# Altium PCB ECEN5730_BRD2.PcbDoc
Units mil, origin at the board's own origin, x right, y up, seen from the top; angles counter-clockwise.
Board outline 3500 x 2170 mil, 2 copper layers (Top Layer, Bottom Layer), stack 61.756 mil thick; 46 components, 30 nets, 147 pads, 19 vias.
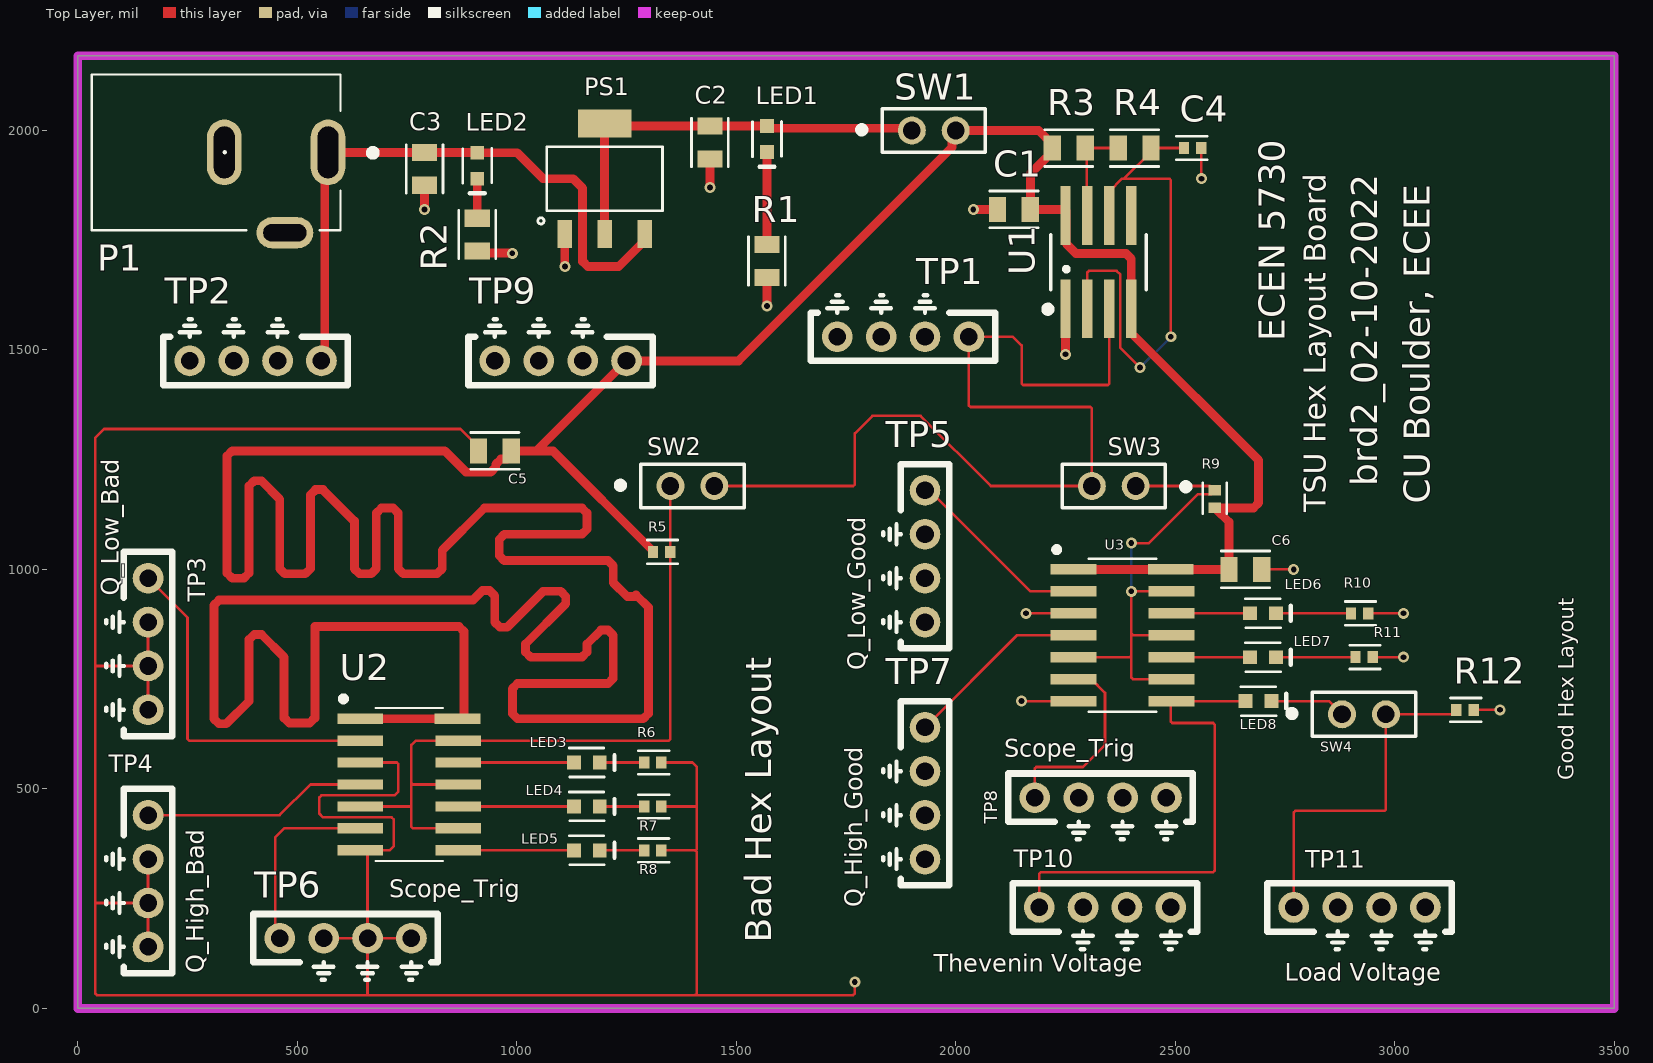
[diagram p0: Top Layer view]
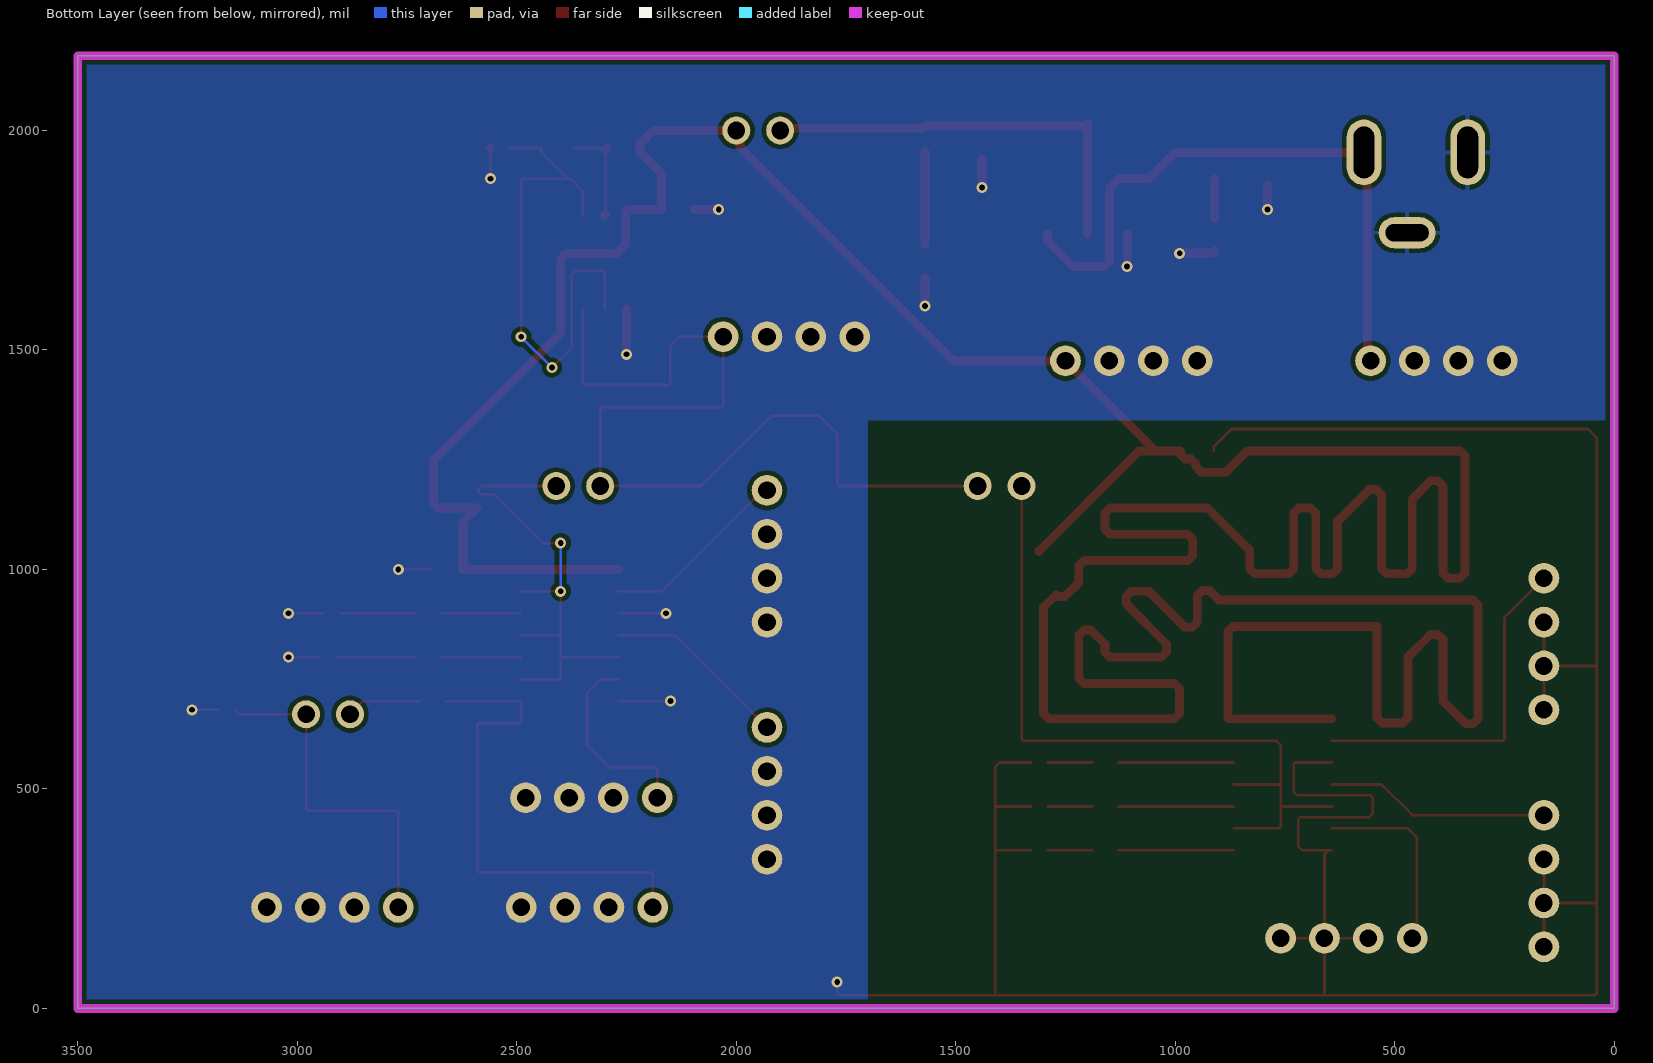
[diagram p1: Bottom Layer view, seen from below]
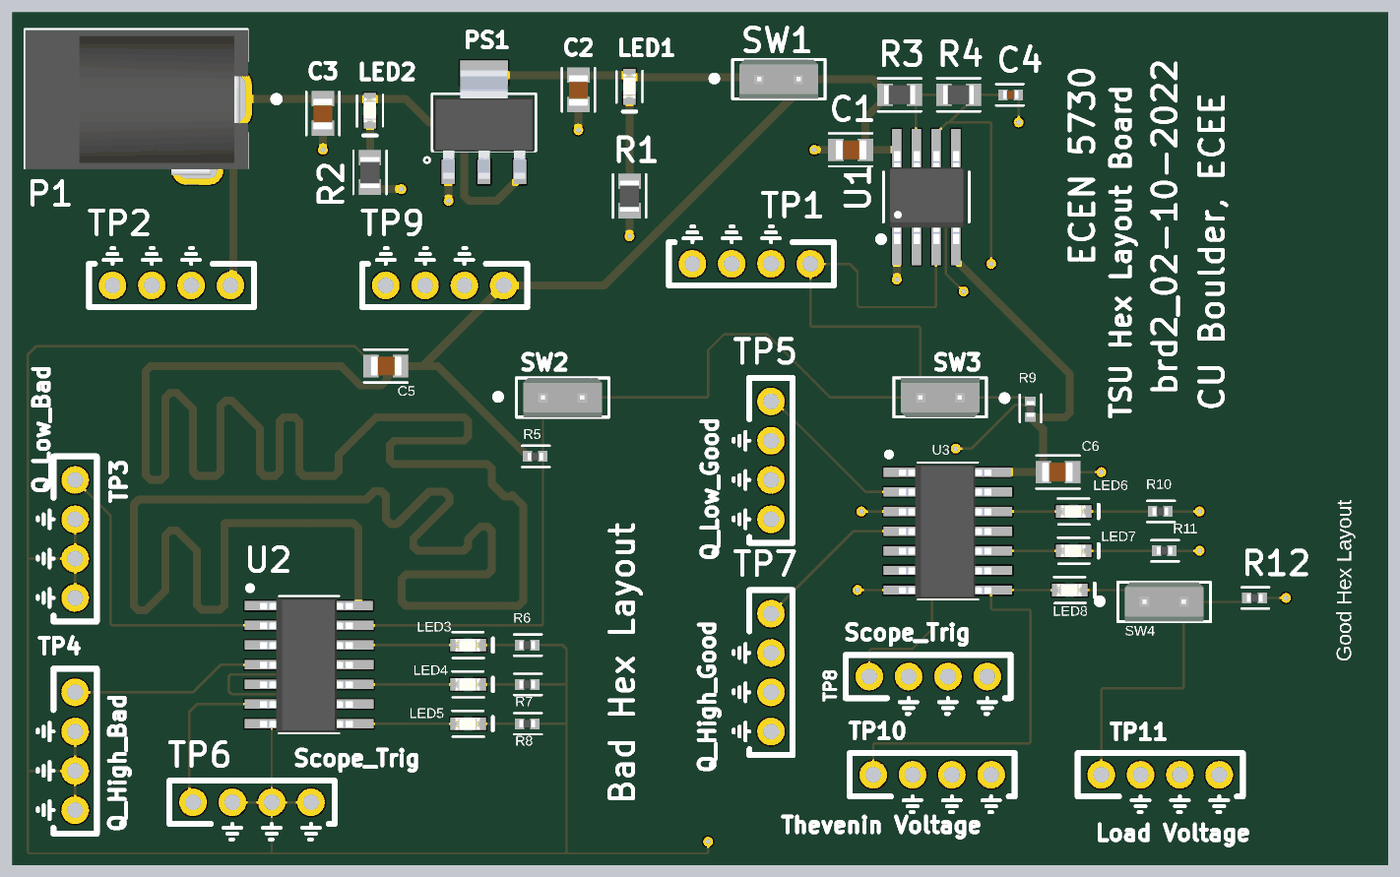
[diagram p2: 3D render of the assembled board from above, using the file's embedded part models]

## Layer stack, top to bottom
Top Solder: solder mask 1, SM-001, Dk 4
Top Layer: signal copper 1.378
Dielectric 1: core 59, Core-043, Dk 4.3
Bottom Layer: signal copper 1.378
Bottom Solder: solder mask 1, SM-001, Dk 4

## Board outline
0,0 3500,0 3500,2170 0,2170

## Design rules (kind name [scope] priority, off if disabled: settings)
Clearance [All] p1: gap=10 ignorepadtopadclearanceinfootprint=FALSE except(0: Arc-Hole Track-Hole SMDPad-Hole THPad-Hole Via-Hole Fill-Hole Poly-Hole Region-Hole Text-Hole)
PlaneClearance [All] p1: clearance=10
PlaneConnect [All] p1: planeconnectstyle=Direct reliefexpansion=20 reliefentries=4 reliefconductorwidth=10 reliefairgap=10
PolygonConnect [All] p1: connectstyle=Direct reliefconductorwidth=10 reliefentries=4 polygonreliefangle="90 Angle" airgapwidth=10
RoutingVias [All] p1: holewidth=13 width=25 viastyle="Through Hole" minholewidth=13 minwidth=25 maxholewidth=60 maxwidth=80
SolderMaskExpansion [All] p1: expansion=4 istentingtop=FALSE
UnRoutedNet [All] p1: checkbadconnections=TRUE
Width [All] p1: maxlimit=100 minlimit=5 preferedwidth=6 minimp=50.000000 maximp=50.000000 favimp=50.000000
27 further rules are at their usual default settings.

## Components (designator, comment, footprint, x,y, rotation, side; value= is the part's Value field where it differs from the comment)
C1 "22uF" 0805_Passive_Capaciitor 2132.6,1820 r180 top
C2 "22uF" 0805_Passive_Capaciitor 1440,1972.6 r90 top
C3 "22uF" 0805_Passive_Capaciitor 790,1912.6 r90 top
C4 "1uF" 0402_Passive_Capacitor 2539.69,1960 r180 top
C5 "22uF" 0805_Passive_Capaciitor 950,1270 r180 top
C6 "22uF" 0805_Passive_Capaciitor 2660,1000 r0 top
LED1 "KT-0603R" LED_0603 1570,1980.47 r270 top value=Green
LED2 "KT-0603R" LED_0603 910,1919.53 r270 top value=Red
LED3 "KT-0603R" LED_0603 1159.53,560 r0 top value=Red
LED4 "KT-0603R" LED_0603 1159.53,460 r0 top value=Red
LED5 "KT-0603R" LED_0603 1159.53,360 r0 top value=Red
LED6 "KT-0603R" LED_0603 2700,900 r0 top value=Red
LED7 "KT-0603R" LED_0603 2700,800 r0 top value=Red
LED8 "KT-0603R" LED_0603 2690,700 r0 top value=Red
P1 "Power Jack" Power_Jack 570,1950 r180 top value="CONN PWR JACK 2X5.5MM SOLDER"
PS1 "AMS1117-3.3" LDO 1200,1890 r0 top value="IC REG LINEAR 3.3V 800MA SOT223"
R1 "1k" 0805_Passive_Resistor 1570,1702.6 r270 top value="1K Ohm"
R2 "1k" 0805_Passive_Resistor 910,1762.6 r270 top value="1K Ohm"
R3 "1k" 0805_Passive_Resistor 2257.4,1960 r180 top value="1K Ohm"
R4 "1k" 0805_Passive_Resistor 2407.4,1960 r180 top value="1K Ohm"
R5 "10k" 0402_Passive_Resistor 1330,1040 r0 top value=10KOhm
R6 "50 Ohms" 0402_Passive_Resistor 1309.68,560 r0 top value=49.9Ohm
R7 "50 Ohms" 0402_Passive_Resistor 1309.68,460 r0 top value=49.9Ohm
R8 "50 Ohms" 0402_Passive_Resistor 1309.68,360 r0 top value=49.9Ohm
R9 "10k" 0402_Passive_Resistor 2590,1160.31 r90 top value=10KOhm
R10 "50 Ohms" 0402_Passive_Resistor 2920,900 r0 top value=49.9Ohm
R11 "50 Ohms" 0402_Passive_Resistor 2930.31,800 r0 top value=49.9Ohm
R12 "50 Ohms" 0402_Passive_Resistor 3160,680 r0 top value=49.9Ohm
SW1 "SW_555_On/Off" 2Pin-Header-Conn 1900,2000 r0 top
SW2 "SW_2Pin_100mil_Switch" 2Pin-Header-Conn 1350,1190 r0 top
SW3 "SW_2Pin_100mil_Switch" 2Pin-Header-Conn 2410,1190 r180 top
SW4 "SW_2Pin_100mil_Switch" 2Pin-Header-Conn 2880,670 r0 top
TP1 "TP_555_Output" TP10x_Probe 1880,1530 r180 top
TP2 "TP_5V" TP10x_Probe 405,1475 r180 top
TP3 "10x Probe TP" TP10x_Probe 160,830 r270 top
TP4 "10x Probe TP" TP10x_Probe 160,290 r270 top
TP5 "10x Probe TP" TP10x_Probe 1930,1030 r270 top
TP6 "10x Probe TP" TP10x_Probe 610,160 r0 top
TP7 "10x Probe TP" TP10x_Probe 1930,490 r270 top
TP8 "10x Probe TP" TP10x_Probe 2330,480 r0 top
TP9 "10x Probe TP" TP10x_Probe 1100,1475 r180 top
TP10 "10x Probe TP" TP10x_Probe 2340,230 r0 top
TP11 "10x Probe TP" TP10x_Probe 2920,230 r0 top
U1 "LMC555CMX/NOPB" TS555IDTTR 2325,1700 r90 top
U2 "74HC14D,653" HEX_74AC14 755,510 r0 top
U3 "74HC14D,653" HEX_74AC14 2380,850 r0 top

## Footprints (in the part's own frame and the unit in brackets; to place one, negate y for a bottom-side part, rotate by r counter-clockwise, add the part's x,y. Pads: shape width x height; smd on the part's side, far side on the other; paste and mask are expansions set on the pad)
2Pin-Header-Conn [mm]
  round 1.62 hole 1.02: 1(0,0) 2(2.54,0)
  silkscreen extent -3.02,-1.27 4.26,1.26, body extent -1.27,-1.27 3.81,1.27, height 8.13
0402_Passive_Capacitor [mm] "Reference: https://www.worthingtonassembly.com/perfect-0402-footprint"
  rect 0.6x0.7 smd mask+0: 1(-0.5,0) 2(0.5,0)
  silkscreen extent -0.84,-0.69 0.94,0.69, body extent -0.5,-0.27 0.5,0.28, height 0.5
0402_Passive_Resistor [mm] "Reference: https://www.worthingtonassembly.com/perfect-0402-footprint"
  rect 0.6x0.7 smd mask+0: 1(-0.5,0) 2(0.5,0)
  silkscreen extent -0.84,-0.69 0.94,0.69, body extent -0.49,-0.25 0.51,0.25, height 0.4
0805_Passive_Capaciitor [mm] "Reference: http://livepartlibrary.com/fpdimensions.html"
  rect 1x1.45 smd mask+0: 1(-0.95,0) 2(0.95,0)
  silkscreen extent -1.4,-1.07 1.4,1.07, body extent -1.04,-0.62 0.96,0.63, height 1.4
0805_Passive_Resistor [mm] "Reference: http://livepartlibrary.com/fpdimensions.html"
  rect 1x1.45 smd mask+0: 1(-0.95,0) 2(0.95,0)
  silkscreen extent -1.4,-1.07 1.4,1.07, body extent -0.98,-0.62 1.02,0.63, height 0.5
HEX_74AC14 [mm]
  rect 2.65x0.6 smd: 1(-2.836,3.81) 2(-2.836,2.54) 3(-2.836,1.27) 4(-2.836,0) 5(-2.836,-1.27) 6(-2.836,-2.54) 7(-2.836,-3.81) 8(2.836,-3.81) 9(2.836,-2.54) 10(2.836,-1.27) 11(2.836,0) 12(2.836,1.27) 13(2.836,2.54) 14(2.794,3.81)
  silkscreen extent -3.94,-4.43 1.95,5.08, body extent -3.18,-4.35 2.82,4.3, height 1.75
LDO [mil]
  rect 33x63 smd: 1(-91,-126) 2(0,-126) 3(91,-126)
  rect 122x63 smd: 4(0,126)
  silkscreen extent -152,-103 132,73, body extent -128,-144 128,132, height 73
LED_0603 [mm]
  rect 0.8x0.8 smd: 1(-0.75,0) 2(0.75,0)
  silkscreen extent -1.02,-0.84 1.6,0.84, body extent -0.84,-0.41 0.76,0.39, height 0.55
Power_Jack [mm]
  oval 2x3.8 hole 1.2 slot 3 at 90 deg: 1(0,0) 2(6,0)
  oval 3.3x1.8 hole 1 slot 2.5 at 0 deg: 3(2.5,4.65)
  silkscreen extent -2.79,-4.5 13.68,4.5, body extent -0.76,-4.45 13.64,4.95, height 11.49
TP10x_Probe [mil] "Small Probs footprint"
  round 70 hole 40: 1(-150,0) 2(-50,0) 2(50,0) 2(150,0)
  silkscreen extent -210,-95 210,55
TS555IDTTR [mm] "IC OSC Single Timer 2.7MHz 8SOIC"
  rect 3.4x0.6 smd: 1(-2.7,1.905) 2(-2.7,0.635) 3(-2.7,-0.635) 4(-2.7,-1.905) 5(2.7,-1.905) 6(2.7,-0.635) 7(2.7,0.635) 8(2.7,1.905)
  silkscreen extent -2.85,-2.77 1.6,3.05, body extent -3.03,-2.48 2.96,2.43, height 1.75

## Part data
C1 C2 C3 C5 C6: library part C_22uF_0805, "MULTILAYER CERAMIC CAPACITORS MLCC - SMD/SMT 22UF 25V 0805 ROHS", LCSC Part#=C45783, MFR Part #=CL21A226MAQNNNE, Datasheet=https://datasheet.lcsc.com/szlcsc/Samsung-Electro-Mechanics-CL21A226MAQNNNE_C45783.pdf, Type=Basic
C4: library part C_1uF_0402, "MULTILAYER CERAMIC CAPACITORS MLCC - SMD/SMT 1UF 25V 0402 ROHS", LCSC Part#=C52923, MFR Part #=CL05A105KA5NQNC, Datasheet=https://datasheet.lcsc.com/szlcsc/Samsung-Electro-Mechanics-CL05A105KA5NQNC_C52923.pdf, Type=Basic
LED1: library part LED_GREEN_0603, "LIGHT EMITTING DIODES (LED) GREEN 520~535NM 112~258MCD@20MA TOP VIEW 0603 ROHS", LCSC Part#=C72043, MFR Part #=19-217/GHC-YR1S2/3T, Type=Basic
LED2 LED3 LED4 LED5 LED6 LED7 LED8: library part LED_RED_0603, "LIGHT EMITTING DIODES (LED) RED 520~625NM 90~100MCD@20MA TOP VIEW 0603 ROHS", LCSC Part#=C2286, Datasheet=https://datasheet.lcsc.com/szlcsc/Everlight-Elec-19-217-BHC-ZL1M2RY-3T_C72041.pdf, MFR Part #=KT-0603R, Type=Basic
P1: library part "P_Power Jack", "Power Barrel Connector Jack 2.10mm ID (0.083\"), 5.50mm OD (0.217\") Through Hole, Right Angle", LCSC Part#=C136744, Digikey Link=https://www.digikey.com/product-detail/en/PJ-102A/CP-102A-ND/275425/?itemSeq=304982367, Digikey Part=CP-102A-ND, Type=Extended
PS1: library part PS_AMS_LDO_3v3, "LOW DROPOUT REGULATORS(LDO) POSITIVE FIXED 1.3V @ 800MA 15V 3.3V 1A SOT-223 ROHS", LCSC Part#=C6186, MFR Part #=AMS1117-3.3, Type=Basic
R1 R2 R3 R4: library part R_1K_0805, "CHIP RESISTOR - SURFACE MOUNT 1KOHMS ±1% 1/8W 0805 ROHS", LCSC Part#=C17513, MFR Part #=0805W8F1001T5E, Type=Basic
R5 R9: library part R_10KOhm_0402, "CHIP RESISTOR - SURFACE MOUNT 10KOHMS ±1% 1/16W 0402 ROHS", LCSC Part#=C25744, MFR Part #=0402WGF1002TCE, Datasheet=https://datasheet.lcsc.com/szlcsc/Uniroyal-Elec-0402WGF1002TCE_C25744.pdf, Type=Basic
R6 R7 R8 R10 R11 R12: library part R_50Ohm_0402, "CHIP RESISTOR - SURFACE MOUNT 49.9OHMS ±1% 1/16W 0402 ROHS", LCSC Part#=C25120, MFR Part #=0402WGF499JTCE, Datasheet=https://datasheet.lcsc.com/szlcsc/Uniroyal-Elec-0402WGF499JTCE_C25120.pdf, Type=Basic
SW1: library part SW_2Pin_100mil_Switch, "2Pin Header", LCSC Part#=C124375, Type=Extended
SW2 SW3 SW4: "2Pin Header", LCSC Part#=C124375, Type=Extended
TP1 TP2 TP3 TP4 TP5 TP6 TP7 TP8 TP9 TP10 TP11: library part TP_10x_Probe, "Test Point 300 mil centers"
U1: library part U_555_Fast, "555 Type, Timer/Oscillator _Single_ IC 3MHz 8-SO", LCSC Part#=C90760, Package=SOIC-8, DigiKey-Purchase-URL=https://www.digikey.com/product-detail/en/texas-instruments/LMC555CMX-NOPB/LMC555CMX-NOPBCT-ND/1010550, MFR Part #=LMC555CMX/NOPB, Type=Extended
U2 U3: library part U_7414_HC_Hex, "Inverter IC 6 Channel Schmitt Trigger 14-SOIC", LCSC Part#=C5605, Datasheet=https://datasheet.lcsc.com/szlcsc/ON-Semicon-ON-74AC14SCX_C5482.pdf, MFR Part #=74HC14D,653, Type=Basic

## Via types
v1: diameter 25, hole 13, Top Layer to Bottom Layer, 19 vias

## Nets (pads, with @x,y where several pads share a name; then routed paths per layer and width w, separated by ;. In a path a pad name is that pad's centre, name@x,y a point inside that pad or via, vN(x,y) a via of type N, cw(c..) or ccw(c..) an arc to the next point about the centre after c; other vN are vias at no path point)
555_Output: SW2.2 SW3.2 TP1.1 U1.3 | length 2264.5
  Top Layer w6: SW2.2 1766.49,1190 1770,1193.51 1770,1310 1810,1350 1920,1350 2080,1190 SW3.2 2310,1366.49 2306.49,1370 2033.51,1370 2030,1373.51 TP1.1 2130,1530 2150,1510 2150,1423.51 2153.51,1420 2346.49,1420 2350,1423.51 U1.3
+3V3: C1.1 C5.1 C6.1 R3.2 R5.1 R9.1 SW1.2 TP9.1 U1.4 U1.8 U2.1 U2.14 U3.1 U3.14 | length 11374.4
  Top Layer w20: U2.1 U2.14 878.19,660 880,661.81 880,858.28 868.28,870 540,870 540,661.72 528.28,650 481.72,650 470,661.72 470,800 418.28,851.72 401.72,851.72 390,840 390,700 338.28,648.28 321.72,648.28 310,660 310,918.28 321.72,930 900,930 921.72,951.72 938.28,951.72 950,940 950,880 961.72,868.28 978.28,868.28 1060,950 1100,950 1111.72,938.28 1111.72,921.72 1020,830 1020,811.72 1031.72,800 1148.28,800 1160,811.72 1160,830 1191.72,861.72 1208.28,861.72 1220,850 1220,751.72 1208.28,740 1001.72,740 990,728.28 990,671.72 1001.72,660 1288.28,660 1300,671.72 1300,913.43 1271.72,941.72 1268.28,938.28 1251.72,938.28 1220,970 1220,1008.28 1208.28,1020 971.72,1020 960,1031.72 960,1068.28 971.72,1080 1148.28,1080 1160,1091.72 1160,1128.28 1148.28,1140 926.57,1140 830,1043.43 830,1001.72 818.28,990 741.72,990 730,1001.72 730,1128.28 718.28,1140 691.72,1140 680,1128.28 680,1001.72 668.28,990 641.72,990 630,1001.72 630,1110 558.28,1181.72 541.72,1181.72 530,1170 530,1001.72 518.28,990 471.72,990 460,1001.72 460,1160 418.28,1201.72 401.72,1201.72 390,1190 390,991.72 378.28,980 351.72,980 340,991.72 340,1258.28 351.72,1270 836.09,1270 884.63,1221.46 940.57,1221.46 952.28,1233.17 952.28,1239.74 964,1251.46 977.72,1251.46 987.4,1261.14 C5.1 1045,1270 ; R5.1 1310.32,1041.97 1082.28,1270 1045,1270 ; U3.1 U3.14 C6.1 2622.6,1108.03 2593.78,1136.85 2593.78,1138.82 R9.1@2592.6,1140 ; R9.1 2591.97,1140.63 R9.1@2592.6,1140 ; 1045,1270 TP9.1 1505,1475 1991.62,1961.62 1991.62,1991.62 SW1.2 2188.86,2000 2220,1968.86 R3.2 2220,1951.14 2170,1901.14 C1.1 2248.19,1820 2251.81,1816.38 2251.81,1741.72 2274.16,1719.37 2388.28,1719.37 2400,1707.65 2400,1538.58 2690,1248.58 2690,1151.72 2678.28,1140 R9.1@2592.6,1140
+5: C3.2 LED2.1 P1.1 PS1.3 TP2.1 | length 1446.9
  Top Layer w15: TP2.1 TP2.1@562.5,1482.5 ; P1.1@562.5,1942.5 P1.1
  Top Layer w20: TP2.1@562.5,1482.5 P1.1@562.5,1942.5 ; P1.1 C3.2 790.47,1949.53 909.53,1949.53 LED2.1 1000.94,1949.06 1060,1890 1128.28,1890 1150,1868.28 1150,1701.72 1161.72,1690 1232,1690 1291,1749 PS1.3
GND: C1.2 C2.1 C3.1 C4.1 C5.2 C6.2 P1.2 P1.3 PS1.1 R1.2 R2.2 R6.2 R7.2 R8.2 R10.2 R11.2 R12.2 TP1.2 TP2.2 TP3.2 TP4.2 TP5.2 TP6.2 TP7.2 TP8.2 TP9.2 TP10.2 TP11.2 U1.1 U2.3 U2.7 U3.3 U3.7 | length 7645.4
  Top Layer w6: TP4.2@160,140 TP4.2@160,240 ; TP4.2@160,340 TP4.2@160,240 ; TP3.2@160,680 TP3.2@160,780 ; TP3.2@160,880 TP3.2@160,780 ; TP6.2@560,160 TP6.2@660,160 ; U2.7 U2.7@651.19,360 ; U2.3 726.49,560 730,556.49 730,493.51 721.67,485.19 555.19,485.19 550,480 550,443.51 558.33,435.19 714.81,435.19 720,430 720,370 710,360 U2.7@651.19,360 ; TP6.2@760,160 TP6.2@660,160 ; C5.2 912.6,1278.86 871.46,1320 60,1320 40,1300 40,780 ; R8.2 1406.49,360 ; R7.2 1406.49,460 1410,463.51 ; R6.2 1400,560 1410,550 1410,463.51 ; v1(1770,60) 1770,33.51 1766.49,30 1406.49,30 ; v1(2150,700) U3.7 ; v1(2160,900) U3.3 ; v1@2559.68,1890.32 C4.1@2559.68,1959.69 ; C6.2 v1(2770,1000) ; R10.2 v1(3020,900) ; R11.2 v1(3020,800) ; R12.2 v1(3240,680) ; 40,240 40,780 ; 40,240 40,33.51 43.51,30 660,30 ; 40,240 TP4.2@160,240 ; 40,780 TP3.2@160,780 ; U2.7@651.19,360 660,351.19 TP6.2@660,160 ; 660,30 1406.49,30 ; 660,30 TP6.2@660,160 ; 1406.49,30 1410,33.51 1410,356.49 1406.49,360 ; 1406.49,360 1410,363.51 1410,463.51
  Top Layer w20: v1(790,1820) C3.1 ; R2.2 914.24,1720.96 989.04,1720.96 v1(990,1720) ; PS1.1 1109.5,1763.5 1109.5,1690.5 v1(1110,1690) ; v1(1440,1870) C2.1 ; v1(1570,1600) R1.2 ; v1(2040,1820) C1.2 ; v1(2250,1490) U1.1 ; C4.1 C4.1@2559.68,1959.69 ; v1@2559.68,1890.32 v1(2560,1890)
NetC2_2: C2.2 LED1.1 PS1.2 PS1.4 SW1.1 | length 958.6
  Top Layer w20: PS1.2 PS1.4 1206,2010 C2.2 LED1.1 1575,2005 1895,2005 SW1.1
NetC4_2: C4.2 R4.1 U1.2 U1.6 | length 1227.3
  Top Layer w6: U1.2 2300,1676.49 2303.51,1680 2366.49,1680 2375.19,1671.3 2375.19,1504.81 v1(2420,1460) ; U1.6 2350,1861.42 2378.58,1890 2383.66,1890 ; v1(2490,1530) 2490,1886.49 2486.49,1890 2383.66,1890 ; C4.2 R4.1 2444.8,1951.14 2383.66,1890
  Bottom Layer w6: v1(2420,1460) v1(2490,1530)
NetLED1_2: LED1.2 R1.1 | length 210.9
  Top Layer w20: R1.1 LED1.2
NetLED2_2: LED2.2 R2.1 | length 90
  Top Layer w20: R2.1 LED2.2
NetLED3_1: LED3.1 U2.12 | length 263.3
  Top Layer w6: U2.12 LED3.1
NetLED3_2: LED3.2 R6.1 | length 100.9
  Top Layer w6: LED3.2 R6.1
NetLED4_1: LED4.1 U2.10 | length 263.3
  Top Layer w6: U2.10 LED4.1
NetLED4_2: LED4.2 R7.1 | length 100.9
  Top Layer w6: LED4.2 R7.1
NetLED5_1: LED5.1 U2.8 | length 263.3
  Top Layer w6: U2.8 LED5.1
NetLED5_2: LED5.2 R8.1 | length 100.9
  Top Layer w6: LED5.2 R8.1
NetLED6_1: LED6.1 U3.12 | length 178.8
  Top Layer w6: U3.12 LED6.1
NetLED6_2: LED6.2 R10.1 | length 170.8
  Top Layer w6: LED6.2 R10.1
NetLED7_1: LED7.1 U3.10 | length 178.8
  Top Layer w6: U3.10 LED7.1
NetLED7_2: LED7.2 R11.1 | length 181.1
  Top Layer w6: LED7.2 R11.1
NetLED8_1: LED8.1 TP10.1 U3.8 | length 1131.3
  Top Layer w6: TP10.1 2190,306.49 2193.51,310 2586.49,310 2590,313.51 2590,646.49 2586.49,650 2493.51,650 2490,653.51 2490,698.35 U3.8 LED8.1
NetLED8_2: LED8.2 SW4.1 | length 172.9
  Top Layer w6: LED8.2 2850,700 SW4.1
NetR3_1: R3.1 R4.2 U1.7 | length 231.1
  Top Layer w6: R3.1 R4.2 ; U1.7@2298.19,1808.11 R3.1@2298.19,1956.61
  Top Layer w20: R3.1 R3.1@2298.19,1956.61 ; U1.7@2298.19,1808.11 U1.7
NetR5_2: R5.2 SW2.1 U2.5 U2.9 U2.11 U2.13 | length 1693.2
  Top Layer w6: U2.5 756.49,460 760,463.51 ; U2.9 763.51,410 760,413.51 760,463.51 ; U2.11 763.51,510 760,513.51 ; SW2.1 1350,1040.31 R5.2 1350,1039.69 1350,613.51 1346.49,610 U2.13 770,610 760,600 760,513.51 ; 760,463.51 760,513.51
NetR9_2: R9.2 SW3.1 U3.5 U3.9 U3.11 U3.13 | length 1142.2
  Top Layer w6: U3.5 2396.49,800 2400,803.51 ; v1(2400,1060) 2440,1060 2551.19,1171.19 2581.19,1171.19 R9.2 2588.03,1180 2578.03,1190 SW3.1 ; U3.9 2403.51,750 2400,753.51 2400,803.51 ; U3.11 2403.51,850 2400,853.51 ; U3.13 v1(2400,950) 2400,853.51 ; R9.2@2579.37,1190 R9.2@2580,1189.37 ; 2400,803.51 2400,853.51
  Bottom Layer w6: v1(2400,950) v1(2400,1060)
NetR12_1: R12.1 SW4.2 TP11.1 | length 811
  Top Layer w6: TP11.1 2770,446.49 2773.51,450 2976.49,450 2980,453.51 SW4.2 3131.5,670 3140.31,678.81 R12.1
NetTP3_1: TP3.1 U2.2 | length 798.6
  Top Layer w6: TP3.1 250,890 250,613.51 253.51,610 U2.2
NetTP4_1: TP4.1 U2.4 | length 512.3
  Top Layer w6: TP4.1 460,440 530,510 U2.4
NetTP5_1: TP5.1 U3.2 | length 433.6
  Top Layer w6: TP5.1 1940,1180 2170,950 U3.2
NetTP6_1: TP6.1 U2.6 | length 435.8
  Top Layer w6: TP6.1 450,170 450,390 470,410 U2.6
NetTP7_1: TP7.1 U3.4 | length 425.3
  Top Layer w6: TP7.1 2140,850 U3.4
NetTP8_1: TP8.1 U3.6 | length 452
  Top Layer w6: TP8.1 2180,546.49 2183.51,550 2290,550 2340,600 2340,718.7 2308.7,750 U3.6
pads on no net: U1.5

## Polygon pours and split planes (outlines as drawn)
GND on Bottom Layer "GND_L02_P000" (solid, pour order 0): 0,2170 3500,2170 3500,0 1700,0 1700,1340 0,1340

## Keep-outs
Keep-Out Layer:
  lines w20: 0,0 0,2170 ; 0,0 3500,0 ; 0,0 0,2170 ; 0,0 3500,0 ; 0,2170 3500,2170 ; 0,2170 3500,2170 ; 3500,0 3500,2170

## Silkscreen, mask and mechanical layers (free items; w line width, h text height)
Top Overlay:
  text "ECEN 5730" at 2750,1520 h60 r90
  text "brd2_02-10-2022" at 2960,1190 h60 r90
  text "CU Boulder, ECEE" at 3080.01,1150 h60 r90
  text "TSU Hex Layout Board" at 2843.34,1130 h50 r90
  text "Q_Low_Bad" at 93.34,940 h40 r90
  text "Q_Low_Good" at 1793.34,770 h40 r90
  text "Scope_Trig" at 2110,573.33 h40
  text "Good Hex Layout" at 3420,520 h60 r90
  text "Scope_Trig" at 710,253.33 h40
  text "Q_High_Good" at 1786.67,230 h40 r90
  text "Bad Hex Layout" at 1580.01,150 h60 r90
  text "Thevenin Voltage" at 1950,83.33 h40
  text "Q_High_Bad" at 286.67,80 h40 r90
  text "Load Voltage" at 2750,63.33 h40